# Altium PCB GD_Power_Meter.PCBDOC
Units mm, origin at the board's own origin, x right, y up, seen from the top; angles counter-clockwise.
Board outline 120.2 x 52.4 mm, 2 copper layers (Top Layer, Bottom Layer); 176 components, 72 nets, 400 pads, 293 vias.
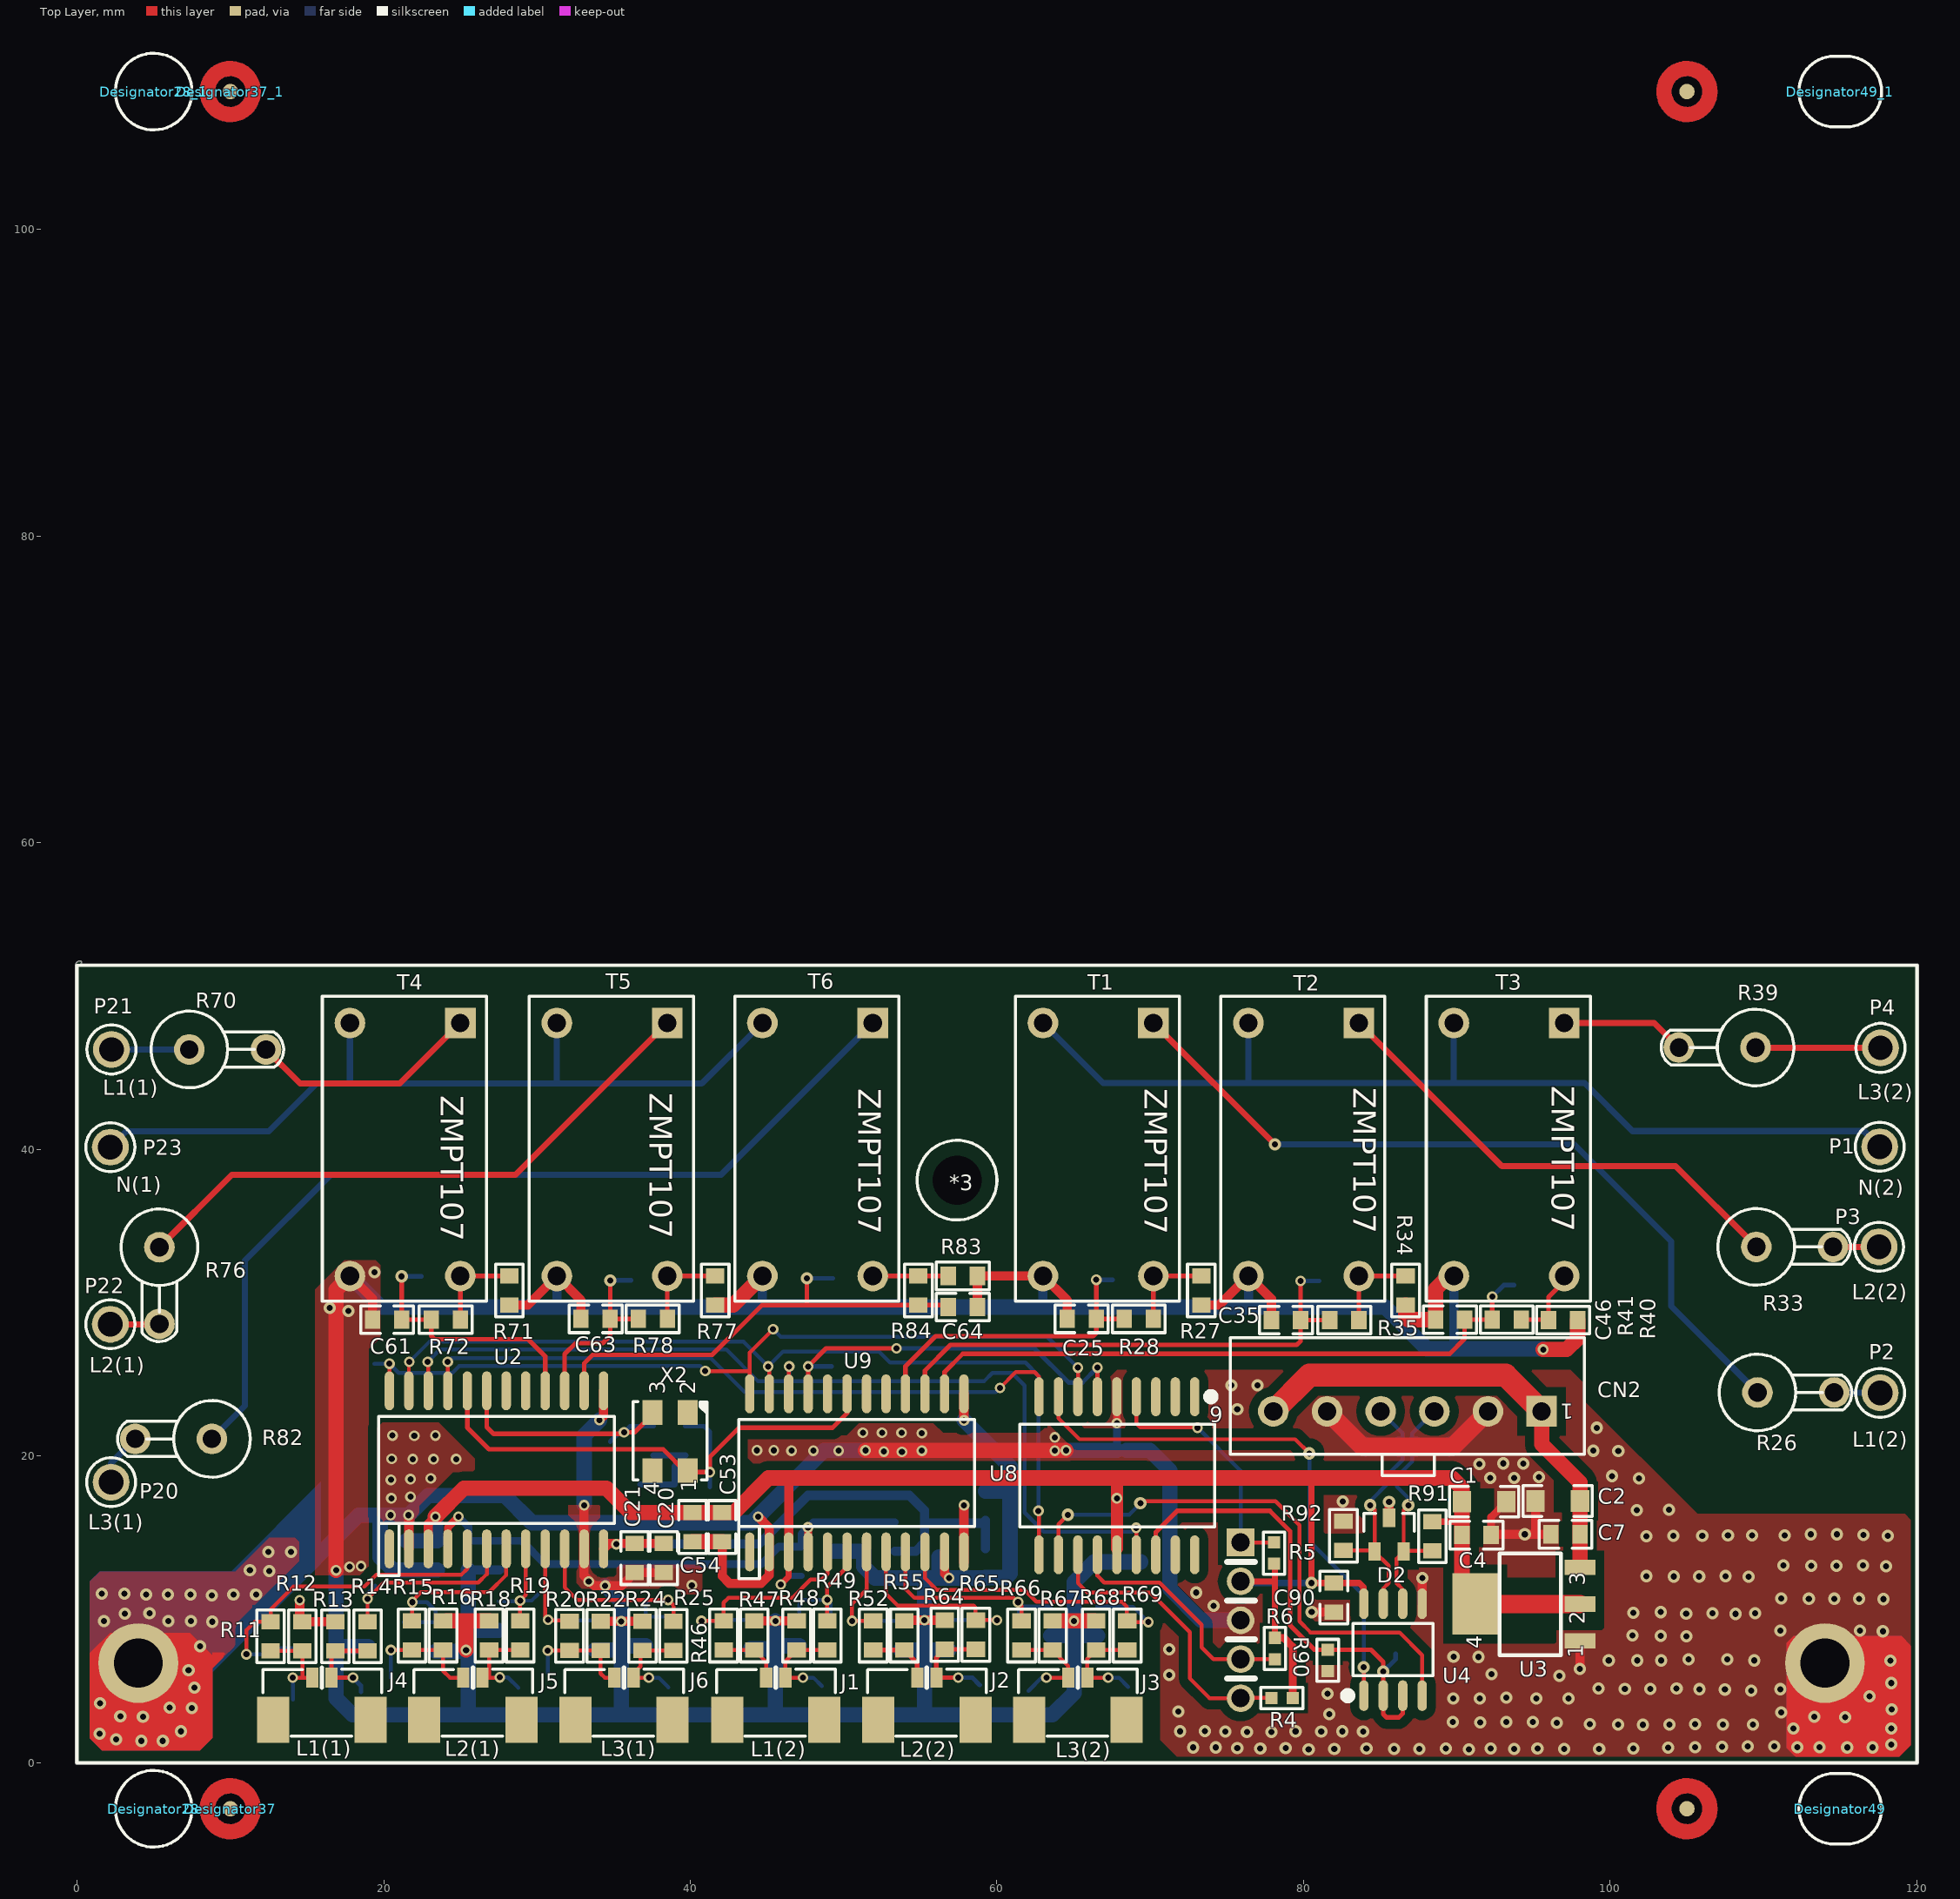
[diagram p0: Top Layer view]
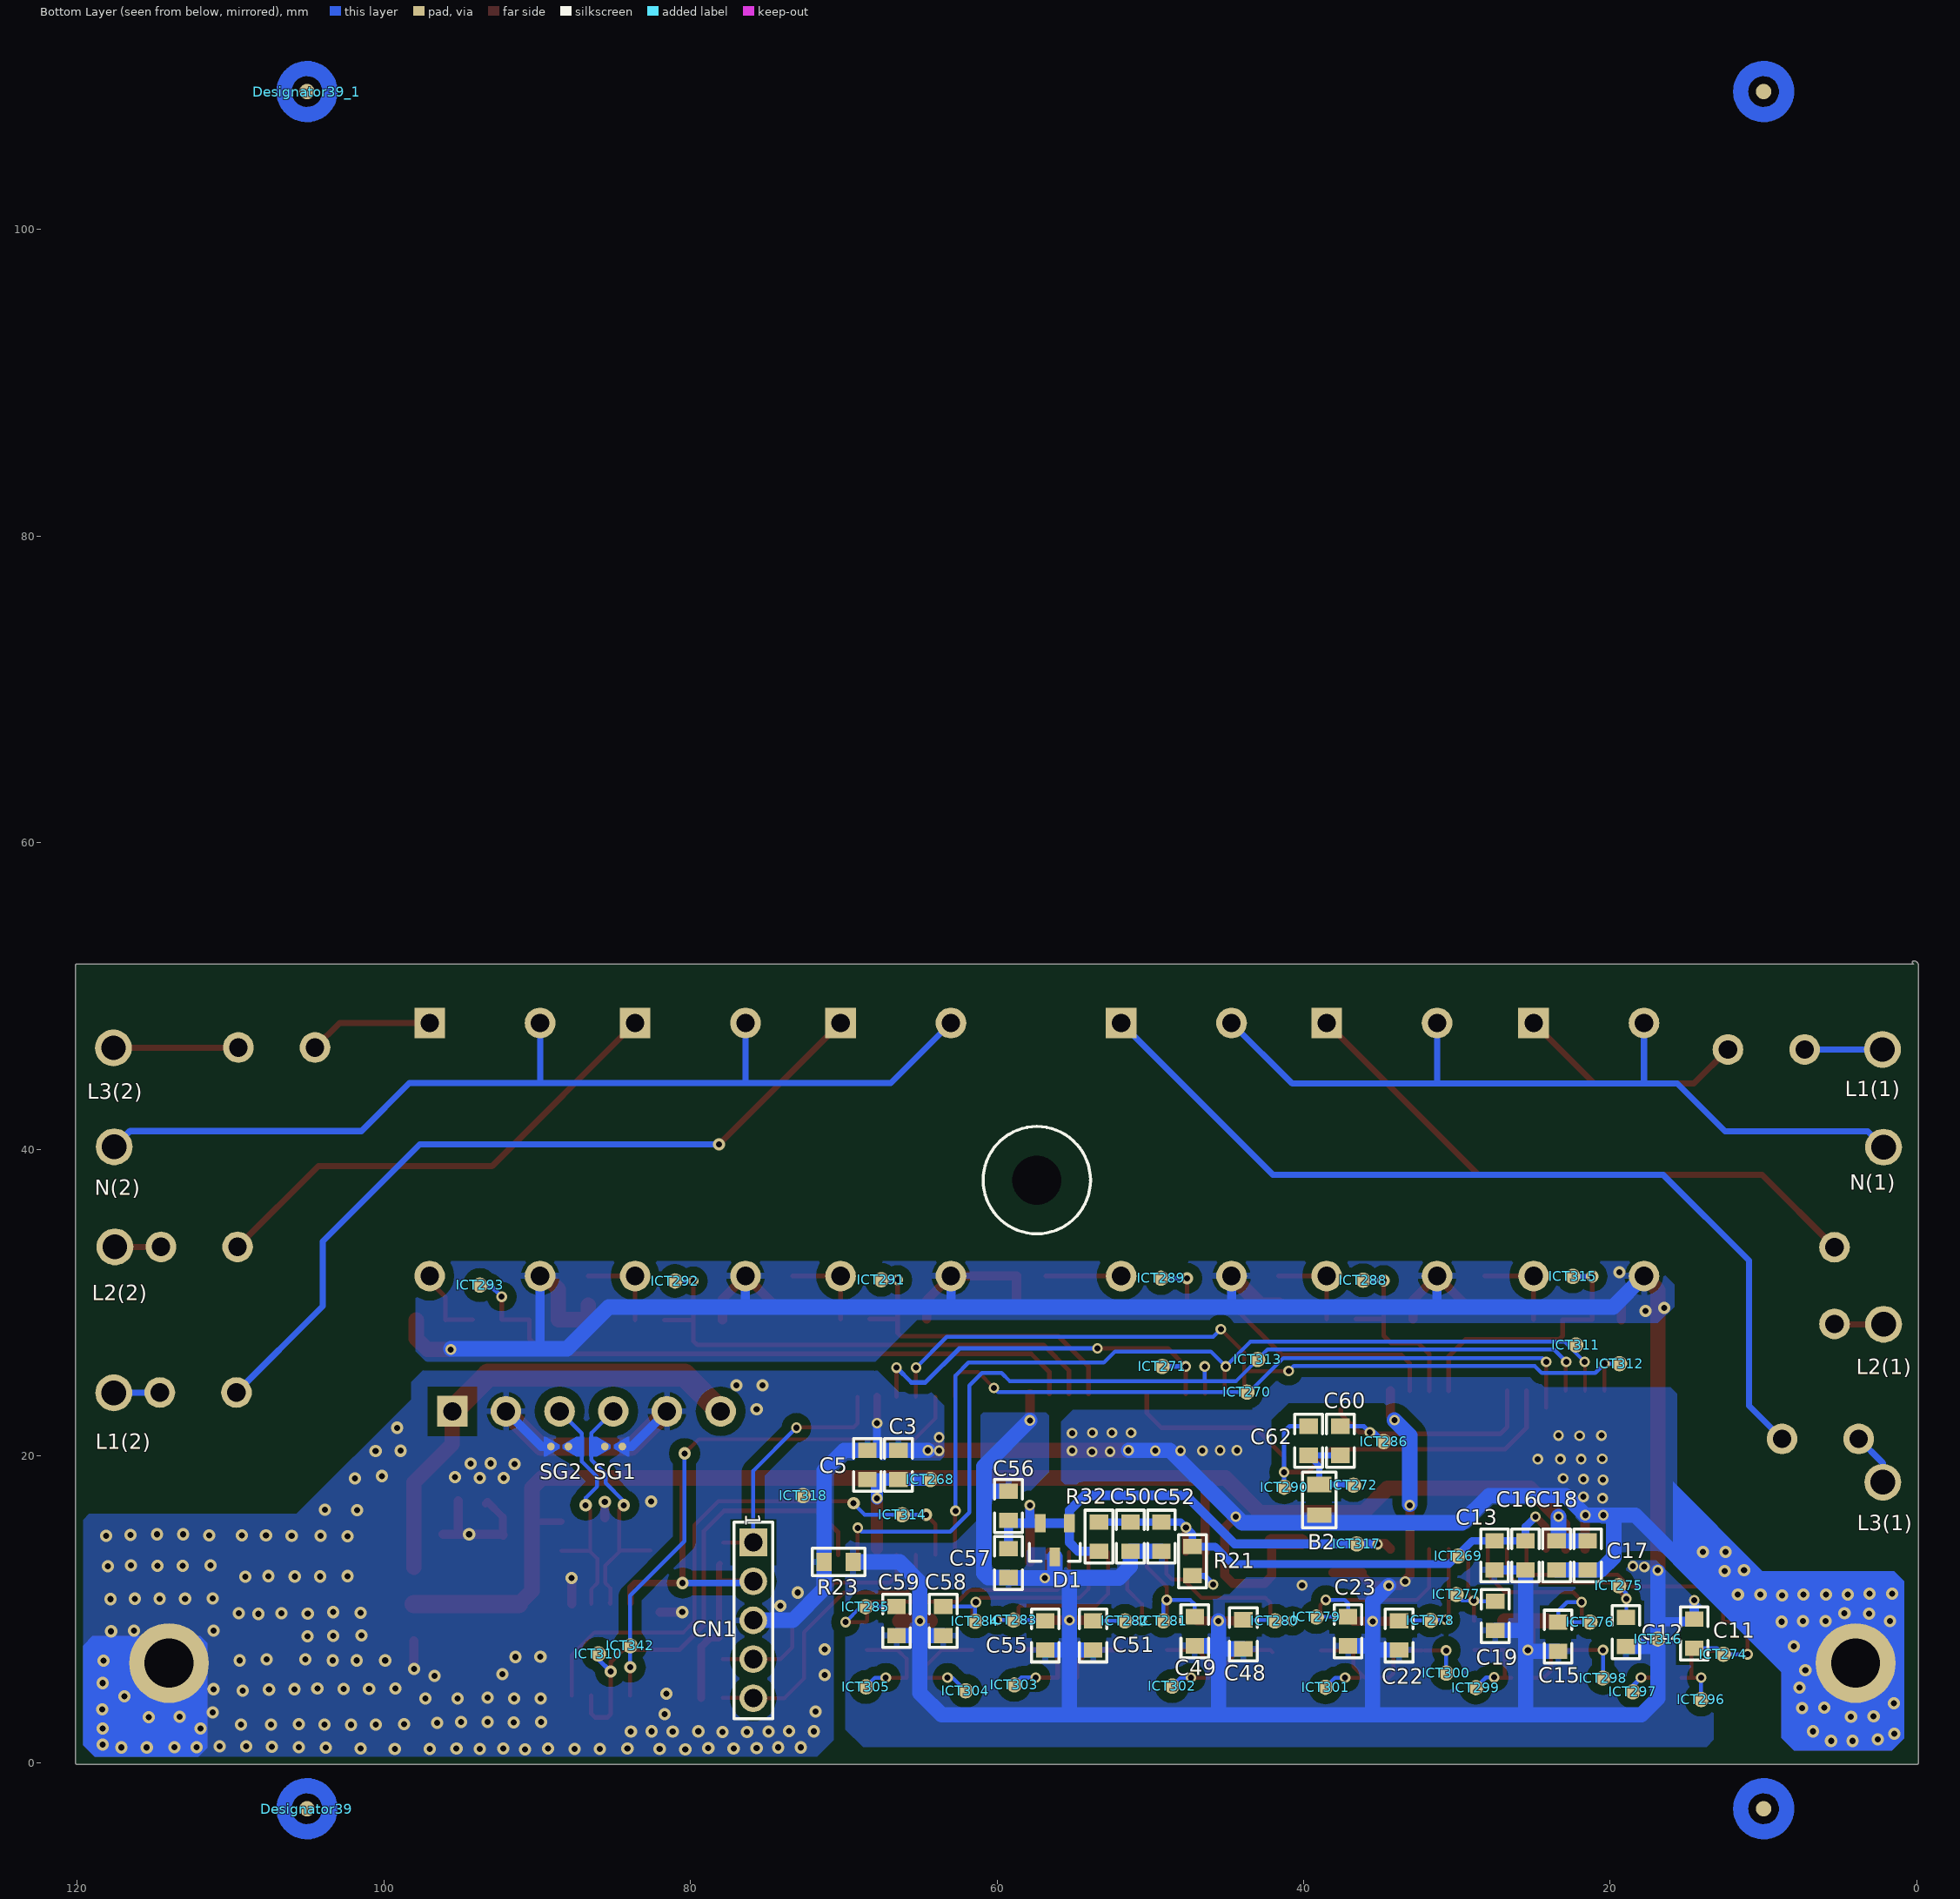
[diagram p1: Bottom Layer view, seen from below]

## Layer stack, top to bottom
Top Solder: solder mask 0.0102, Solder Resist, Dk 3.5
Top Layer: signal copper 0.0356
Dielectric1: dielectric 0.32, FR-4, Dk 4.8
Bottom Layer: signal copper 0.0356
Bottom Solder: solder mask 0.0102, Solder Resist, Dk 3.5

## Board outline
-0.101,0 -0.101,52 cw(c0.2,52) 0.2,52.301 cw(c0.2,52.2) 0.3,52.2 cw(c0.2,52.2) 0.212,52.101 120,52.101 cw(c120,52) 120.101,52 cw(c120,52) 120.1,51.988 cw(c120,51.975) 120.101,51.975 120.101,0 cw(c120,0) 120,-0.1 0,-0.1 cw(c0,0)

## Design rules (kind name [scope] priority, off if disabled: settings)
Clearance Clearance_2 [IsVia OR IsPad vs IsVia OR IsPad] p1: gap=0.4
Clearance Clearance_1 [(InPolygon)] p2: gap=0.6
Clearance [All] p3: gap=0.2
ComponentClearance [All] p1 off: gap=0.254 collisioncheckmode=3 verticalgap=0.254 showdistances=FALSE
FabricationTestPointUsage TestPointUsage [All] p1: valid=0 allowmultiple=FALSE
FabricationTestpoint Testpoint [All] p1: side=3 testpointundercomponent=TRUE minsize=1.016 maxsize=2.54 preferedsize=1.524 minholesize=0 maxholesize=1.016 preferedholesize=0.813 testpointgrid=0.025 allowsidetop=TRUE allowsidebottom=TRUE usegrid=TRUE gridtolerance=0
Height [All] p1 off: minheight=0 maxheight=25.4 prefheight=12.7
HoleSize [All] p1: absolutevalues=TRUE maxlimit=10 minlimit=0.3 maxpercent=80.000 minpercent=20.000
PlaneClearance [All] p1: clearance=0
PlaneConnect [All] p1: planeconnectstyle=Direct reliefexpansion=0.508 reliefentries=4 reliefconductorwidth=0.254 reliefairgap=0.254
PolygonConnect PolygonConnect_4 [InComponent('L1')OR InComponent('C6')OR InComponent('C27')OR InComponent('C28')] p1: connectstyle=Relief reliefconductorwidth=0.4 reliefentries=4 polygonreliefangle="90 Angle" airgapwidth=0.254
PolygonConnect PolygonConnect_3 [HasFootprint('ICTP1_0')] p2: connectstyle=Direct reliefconductorwidth=0.254 reliefentries=4 polygonreliefangle="90 Angle" airgapwidth=0.254
PolygonConnect PolygonConnect_2 [isVIA] p3: connectstyle=Direct reliefconductorwidth=0.254 reliefentries=4 polygonreliefangle="90 Angle" airgapwidth=0.254
PolygonConnect PolygonConnect_1 [OnLayer('Bottom Layer')] p4: connectstyle=Relief reliefconductorwidth=0.4 reliefentries=4 polygonreliefangle="90 Angle" airgapwidth=0.254
PolygonConnect [All] p5: connectstyle=Direct reliefconductorwidth=0.4 reliefentries=4 polygonreliefangle="90 Angle" airgapwidth=0.254
RoutingVias [All] p1: holewidth=0.6 width=1 viastyle="Through Hole" minholewidth=0.3 minwidth=0.7 maxholewidth=0.6 maxwidth=1
SilkToSolderMaskClearance SilkscreenOverComponentPads [IsPad] p1: minsilkscreentomaskgap=0.254 clearancetoexposedcopper=TRUE
SolderMaskExpansion [All] p1: expansion=0
Width [All] p1: maxlimit=10 minlimit=0.254 preferedwidth=0.3
21 further rules are at their usual default settings.

## Classes and differential pairs
component class SC10056E1: C1 C2 C3 C4 C5 C7 C90 CN1 CN2 CN5 D2 P1 P2 P3 P4 P20 P21 P22 P23 R4 R5 R6 R90 R91 R92 SG1 SG2 U3 U4 U8
component class 7758_2: C25 C35 C46 C48 C49 C50 C51 C52 C53 C54 C55 C56 C57 C58 C59 J1 J2 J3 R26 R27 R28 R33 R34 R35 R39 R40 R41 R46 R47 R48 R49 R52 R55 R64 R65 R66 R67 R68 R69 T1 T2 T3 U9
component class 7758_1: B2 C11 C12 C13 C15 C16 C17 C18 C19 C20 C21 C22 C23 C60 C61 C62 C63 C64 D1 J4 J5 J6 R11 R12 R13 R14 R15 R16 R18 R19 R20 R21 R22 R23 R24 R25 R32 R70 R71 R72 R76 R77 R78 R82 R83 R84 T4 T5 T6 U2 X2

## Components (designator, comment, footprint, x,y, rotation, side; value= is the part's Value field where it differs from the comment)
*3 "PAD" SCREW3_2 57.4,38 r0 top
B2 "FERRITE" L0805 38.975,17.15 r90 bottom
C1 "CAP" C1206 91.775,17.025 r180 top
C2 "CAP" C1206 96.575,17.075 r0 top
C3 "CAP" C0805 66.425,19.425 r90 bottom
C4 "CAP" C0805 91.275,14.85 r0 top
C5 "CAP" C0805 68.45,19.425 r90 bottom
C7 "CAP" C0805 97.075,14.9 r180 top
C11 "CAP" C0805 14.525,8.425 r270 bottom
C12 "CAP" C0805 18.975,8.525 r90 bottom
C13 "10uF" C0805 27.55,13.525 r90 bottom
C15 "CAP" C0805 23.4,8.225 r90 bottom
C16 "CAP" C0805 25.525,13.525 r90 bottom
C17 "10uF" C0805 21.475,13.525 r270 bottom
C18 "CAP" C0805 23.5,13.525 r270 bottom
C19 "CAP" C0805 27.5,9.575 r90 bottom
C20 "CAP" C0805 38.275,13.35 r90 top
C21 "CAP" C0805 36.375,13.35 r90 top
C22 "CAP" C0805 33.775,8.3 r90 bottom
C23 "CAP" C0805 37.1,8.575 r90 bottom
C25 "CAP" C0805 65.525,28.95 r0 top
C35 "CAP" C0805 78.85,28.875 r0 top
C46 "CAP" C0805 89.55,28.9 r0 top
C48 "CAP" C0805 43.925,8.375 r90 bottom
C49 "CAP" C0805 47.1,8.575 r90 bottom
C50 "10uF" C0805 51.3,14.75 r90 bottom
C51 "CAP" C0805 53.725,8.3 r90 bottom
C52 "CAP" C0805 49.275,14.75 r90 bottom
C53 "10uF" C0805 42.075,15.375 r270 top
C54 "CAP" C0805 40.15,15.375 r270 top
C55 "CAP" C0805 56.85,8.3 r90 bottom
C56 "CAP" C0805 59.25,16.75 r270 bottom
C57 "CAP" C0805 59.25,13.025 r90 bottom
C58 "CAP" C0805 63.5,9.25 r90 bottom
C59 "CAP" C0805 66.55,9.25 r90 bottom
C60 "CAP" C0805 37.6,21 r270 bottom
C61 "CAP" C0805 20.225,28.9 r0 top
C62 "CAP" C0805 39.675,21 r270 bottom
C63 "CAP" C0805 33.825,28.95 r0 top
C64 "CAP" C0805 57.775,29.725 r180 top
C90 "CAP" C0805 81.975,10.775 r270 top (schematic designator C200)
CN1 "SIP5" SIP5 75.89,14.375 r270 bottom
CN2 "Header 6" 0532580629 95.525,22.925 r180 top
D1 "Diode-3_2" SOT23-321 56.225,14.525 r0 bottom
D2 "TVS-D" SOT23-123 85.575,14.775 r0 top (schematic designator D200)
Designator28 "Comment" AI2 5,-3 r270 top
Designator28_1 "Comment" AI2 5,109 r270 top
Designator37 "Comment" MARK2 10,-3 r270 top
Designator37_1 "Comment" MARK2 10,109 r270 top
Designator39 "Comment" MARK2 105,-3 r270 bottom
Designator39_1 "Comment" MARK2 105,109 r270 bottom
Designator49 "Comment" AI1 115,-3 r0 top
Designator49_1 "Comment" AI1 115,109 r0 top
ICT268 "Comment" ICTP1_0 64.35,18.475 r0 bottom
ICT269 "Comment" ICTP1_0 29.925,13.475 r0 bottom
ICT270 "Comment" ICTP1_0 43.7,24.175 r0 bottom
ICT271 "Comment" ICTP1_0 49.225,25.85 r0 bottom
ICT272 "Comment" ICTP1_0 36.75,18.1 r0 bottom
ICT274 "Comment" ICTP1_0 12.625,7.075 r0 bottom
ICT275 "Comment" ICTP1_0 19.45,11.55 r0 bottom
ICT276 "Comment" ICTP1_0 21.325,9.175 r0 bottom
ICT277 "Comment" ICTP1_0 30.05,10.975 r0 bottom
ICT278 "Comment" ICTP1_0 31.725,9.275 r0 bottom
ICT279 "Comment" ICTP1_0 39.175,9.5 r0 bottom
ICT280 "Comment" ICTP1_0 41.875,9.25 r0 bottom
ICT281 "Comment" ICTP1_0 49.15,9.25 r0 bottom
ICT282 "Comment" ICTP1_0 51.65,9.25 r0 bottom
ICT283 "Comment" ICTP1_0 58.925,9.3 r0 bottom
ICT284 "Comment" ICTP1_0 61.425,9.225 r0 bottom
ICT285 "Comment" ICTP1_0 68.575,10.175 r0 bottom
ICT286 "Comment" ICTP1_0 34.775,20.95 r0 bottom
ICT288 "Comment" ICTP1_0 36.125,31.475 r0 bottom
ICT289 "Comment" ICTP1_0 49.3,31.6 r0 bottom
ICT290 "Comment" ICTP1_0 41.275,17.975 r0 bottom
ICT291 "Comment" ICTP1_0 67.55,31.5 r0 bottom
ICT292 "Comment" ICTP1_0 81,31.425 r0 bottom
ICT293 "Comment" ICTP1_0 93.725,31.15 r0 bottom
ICT296 "Comment" ICTP1_0 14.075,4.125 r0 bottom
ICT297 "Comment" ICTP1_0 18.525,4.625 r0 bottom
ICT298 "Comment" ICTP1_0 20.475,5.525 r0 bottom
ICT299 "Comment" ICTP1_0 28.775,4.9 r0 bottom
ICT300 "Comment" ICTP1_0 30.7,5.85 r0 bottom
ICT301 "Comment" ICTP1_0 38.575,4.925 r0 bottom
ICT302 "Comment" ICTP1_0 48.575,5 r0 bottom
ICT303 "Comment" ICTP1_0 58.875,5.075 r0 bottom
ICT304 "Comment" ICTP1_0 62.05,4.692 r0 bottom
ICT305 "Comment" ICTP1_0 68.55,4.95 r0 bottom
ICT310 "Comment" ICTP1_0 86,7.1 r0 bottom
ICT311 "Comment" ICTP1_0 22.25,27.25 r0 bottom
ICT312 "Comment" ICTP1_0 19.4,26.025 r0 bottom
ICT313 "Comment" ICTP1_0 43,26.3 r0 bottom
ICT314 "Comment" ICTP1_0 66.175,16.175 r0 bottom
ICT315 "Comment" ICTP1_0 22.45,31.725 r0 bottom
ICT316 "Comment" ICTP1_0 16.896,8.075 r0 bottom
ICT317 "Comment" ICTP1_0 36.55,14.275 r0 bottom
ICT318 "Comment" ICTP1_0 72.65,17.425 r0 bottom
ICT342 "Comment" ICTP1_0 83.925,7.625 r0 bottom
J1 "Header 2" 533980271_SD 42.4,2.8 r0 top (schematic designator J4)
J2 "Header 2" 533980271_SD 52.25,2.8 r0 top (schematic designator J5)
J3 "Header 2" 533980271_SD 62.1,2.8 r0 top (schematic designator J6)
J4 "Header 2" 533980271_SD 12.8,2.8 r0 top locked (schematic designator J1)
J5 "Header 2" 533980271_SD 22.65,2.8 r0 top (schematic designator J2)
J6 "Header 2" 533980271_SD 32.5,2.8 r0 top (schematic designator J3)
P1 "Header 1" PAD1_3 117.575,40.175 r0 top
P2 "Header 1" PAD1_3 117.6,24.125 r0 top
P3 "Header 1" PAD1_3 117.525,33.65 r0 top
P4 "Header 1" PAD1_3 117.625,46.625 r0 top
P20 "Header 1" PAD1_3 2.225,18.3 r0 top
P21 "Header 1" PAD1_3 2.25,46.525 r0 top
P22 "Header 1" PAD1_3 2.175,28.6 r0 top
P23 "Header 1" PAD1_3 2.175,40.15 r0 top
R4 "RES" R0603 78.59,4.225 r180 top
R5 "RES" R0603 78.075,13.675 r90 top
R6 "RES" R0603 78.125,7.45 r270 top
R11 "RES" R0805 12.625,8.25 r90 top
R12 "RES" R0805 14.7,8.25 r90 top
R13 "RES" R0805 16.85,8.25 r90 top
R14 "RES" R0805 18.95,8.25 r90 top
R15 "RES" R0805 21.85,8.3 r90 top
R16 "RES" R0805 23.875,8.3 r90 top
R18 "RES" R0805 26.875,8.3 r90 top
R19 "RES" R0805 28.9,8.3 r90 top
R20 "RES" R0805 32.125,8.275 r90 top
R21 "RES" R0805 47.25,13.15 r90 bottom
R22 "RES" R0805 34.15,8.275 r90 top
R23 "RES" R0805 70.325,13.1 r0 bottom
R24 "RES" R0805 36.875,8.275 r90 top
R25 "RES" R0805 38.9,8.275 r90 top
R26 "RES" MFR5W2P5 114.6,24.15 r180 top
R27 "RES" R0805 73.325,30.8 r90 top
R28 "RES" R0805 69.25,28.95 r180 top
R32 "RES" R0805 53.35,14.75 r90 bottom
R33 "RES" MFR5W2P5 114.525,33.65 r180 top
R34 "RES" R0805 86.65,30.8 r90 top
R35 "RES" R0805 82.65,28.875 r180 top
R39 "RES" MFR5W2P5 104.475,46.65 r0 top
R40 "RES" R0805 96.925,28.875 r180 top
R41 "RES" R0805 93.25,28.9 r180 top
R46 "RES" R0805 42.175,8.3 r90 top
R47 "RES" R0805 44.175,8.3 r90 top
R48 "RES" R0805 46.933,8.3 r90 top
R49 "RES" R0805 48.933,8.3 r90 top
R52 "RES" R0805 51.925,8.3 r90 top
R55 "RES" R0805 53.95,8.3 r90 top
R64 "RES" R0805 56.6,8.35 r90 top
R65 "RES" R0805 58.625,8.35 r90 top
R66 "RES" R0805 61.6,8.3 r90 top
R67 "RES" R0805 63.625,8.3 r90 top
R68 "RES" R0805 66.475,8.3 r90 top
R69 "RES" R0805 68.5,8.3 r90 top
R70 "RES" MFR5W2P5 12.325,46.525 r180 top
R71 "RES" R0805 28.2,30.8 r90 top
R72 "RES" R0805 24.05,28.9 r180 top
R76 "RES" MFR5W2P5 5.375,28.625 r90 top
R77 "RES" R0805 41.625,30.8 r90 top
R78 "RES" R0805 37.55,28.95 r180 top
R82 "RES" MFR5W2P5 3.8,21.125 r0 top
R83 "RES" R0805 57.775,31.75 r180 top
R84 "RES" R0805 54.875,30.8 r270 top
R90 "RES" R0603 81.575,6.675 r90 top (schematic designator R200)
R91 "RES" R0805 88.4,14.775 r270 top (schematic designator R201)
R92 "RES" R0805 82.6,14.8 r90 top (schematic designator R202)
SG1 "Default" PAD 85.575,20.625 r180 bottom
SG2 "Default" PAD 87.95,20.625 r0 bottom
T1 "ET00010" ZMPT107 66.6,40 r270 top
T2 "ET00010" ZMPT107 80,40 r270 top
T3 "ET00010" ZMPT107 93.4,40 r270 top
T4 "ET00010" ZMPT107 21.4,40 r270 top
T5 "ET00010" ZMPT107 34.9,40 r270 top
T6 "ET00010" ZMPT107 48.3,40 r270 top
U2 "ADE7758" SOIC24-W 20.375,13.95 r0 top
U3 "LM1117_ADJ" AS1117 98.025,7.95 r90 top
U4 "SN65HVD11D" SOIC8 83.925,4.375 r0 top (schematic designator U200)
U8 "PIC16LF1827" SO18 72.9,23.875 r180 top
U9 "ADE7758" SOIC24-W 43.875,13.75 r0 top
X2 "ABM3C" XTAL_5X3_2 38.675,20.95 r90 top

## Footprints (in the part's own frame and the unit in brackets; to place one, negate y for a bottom-side part, rotate by r counter-clockwise, add the part's x,y. Pads: shape width x height; smd on the part's side, far side on the other; paste and mask are expansions set on the pad)
0532580629 [mm]
  rect 2x2 hole 1.2: 1(0,0)
  round 2 hole 1.2: 2(3.5,0) 3(7,0) 4(10.5,0) 5(14,0) 6(17.5,0)
  silkscreen extent -2.8,-4.8 20.3,4.2, body extent -2.8,-4.9 20.3,2.8, height 10.5
533980271_SD [mm]
  rect 2.1x3 smd: 0(0,0) 0(6.35,0)
  rect 0.8x1.3 smd: 1(2.55,2.75) 2(3.8,2.75)
  silkscreen extent -0.69,-1.07 7.06,3.4, body extent -0.69,-1.07 7.06,3.3, height 4.7
AI1 [mm]
  round 0.5 hole 4 unplated: 1(0,0)
  silkscreen extent -2.7,-2.3 2.7,2.3
AI2 [mm]
  round 0.5 hole 4 unplated: 1(0,0)
  silkscreen extent -2.5,-2.5 2.5,2.5
AS1117 [mm]
  rect 1x2 smd: 1(0,0) 2(2.4,0) 3(4.8,0)
  rect 4x3 smd: 4(2.4,6.835)
  silkscreen extent -0.94,1.25 5.7,5.25, body extent -0.94,1.25 5.7,5.25, height 2.5
C0805 [mm]
  rect 1x1.2 smd: 1(-0.95,0) 2(0.95,0)
  silkscreen extent -1.73,-0.9 1.73,0.9, body extent -1.55,-0.7 1.55,0.7, height 1
C1206 [mm]
  rect 1.2x1.4 smd: 1(-1.45,0) 2(1.45,0)
  silkscreen extent -2.25,-1 2.25,1, body extent -2.3,-0.8 2.3,0.8, height 1
ICTP1_0 [mm]
  round 1 smd: 1(0,0)
L0805 [mm] "2923451010"
  rect 1x1.6 smd: 1(-1,0) 2(1,0)
  silkscreen extent -1.83,-1.1 1.8,1.1, body extent -1.6,-0.9 1.6,0.9, height 1.6
MARK2 [mm]
  round 1 smd: 1(0,0)
  round 1 smd far side: 1(0,0)
  Top Layer circle w1: c0,0 r1.5
  Bottom Layer circle w1: c0,0 r1.5
MFR5W2P5 [mm]
  round 2 hole 1.2: 1(0,0) 2(5,0)
  silkscreen extent -1.15,-2.5 7.5,2.5, body extent -1.1,-2.49 7.5,2.5, height 15.5
PAD [mil] "SPARKGAP"
  round 20 smd: 1(0,0) 2(45,0)
  Top Layer region: 23,-5 58,-25 63,-25 63,25 58,25 23,5
  Top Layer region: 15,5 -20,25 -40,25 -40,-25 -20,-25 15,-5
PAD1_3 [mm]
  round 2.4 hole 1.6: 1(0,0)
  silkscreen extent -1.6,-1.6 1.6,1.6
R0603 [mm]
  rect 0.8x0.8 smd: 1(-0.7,0) 2(0.7,0)
  silkscreen extent -1.38,-0.7 1.38,0.7
R0805 [mm]
  rect 1x1.2 smd: 1(-0.95,0) 2(0.95,0)
  silkscreen extent -1.73,-0.9 1.73,0.9, body extent -1.55,-0.7 1.55,0.7, height 1
SCREW3_2 [mm]
  round 0 hole 3.2 unplated: 1(0,0)
  silkscreen extent -2.6,-2.6 2.6,2.6
SIP5 [mm]
  rect 1.8x1.8 hole 1.2: 1(0,0)
  round 1.8 hole 1.2: 2(2.54,0) 3(5.08,0) 4(7.62,0) 5(10.16,0)
  silkscreen extent -1.32,-1.27 11.5,1.27, body extent -1.42,-1.37 11.6,1.37, height 7
SO18 [mil]
  oval 24x100 smd: 1(0,0) 2(50,0) 3(100,0) 4(150,0) 5(200,0) 6(250,0) 7(300,0) 8(350,0) 9(400,0) 10(400,406) 11(350,406) 12(300,406) 13(250,406) 14(200,406) 15(150,406) 16(100,406) 17(50,406) 18(0,406)
  silkscreen extent -51,-10 449,335, body extent -51,71 449,335, height 102
SOIC8 [mm]
  oval 0.61x2 smd: 1(0,0) 2(1.27,0) 3(2.54,0) 4(3.81,0) 5(3.81,6) 6(2.54,6) 7(1.27,6) 8(0,6)
  silkscreen extent -1.3,-0.25 4.51,4.7, body extent -0.7,1.3 4.51,4.7, height 1.75
SOIC24-W [mm]
  oval 0.61x2.54 smd: 1(0,0) 2(1.27,0) 3(2.54,0) 4(3.81,0) 5(5.08,0) 6(6.35,0) 7(7.62,0) 8(8.89,0) 9(10.16,0) 10(11.43,0) 11(12.7,0) 12(13.97,0) 13(13.97,10.312) 14(12.7,10.312) 15(11.43,10.312) 16(10.16,10.312) 17(8.89,10.312) 18(7.62,10.312) 19(6.35,10.312) 20(5.08,10.312) 21(3.81,10.312) 22(2.54,10.312) 23(1.27,10.312) 24(0,10.312)
  silkscreen extent -0.7,-1.75 14.67,8.64, body extent -0.7,1.65 14.67,8.64, height 2.5
SOT23-123 [mm]
  rect 0.8x1.2 smd: 1(-0.95,-1) 2(0.95,-1) 3(0,1.2)
  silkscreen extent -1.65,0.33 1.65,1.48, body extent -1.6,-1.3 1.6,1.3, height 1.2
SOT23-321 [mm]
  rect 0.7x1.2 smd: 1(0,1.1) 2(0.95,-1.1) 3(-0.95,-1.1)
  silkscreen extent -1.65,0.23 1.65,1.38
XTAL_5X3_2 [mm] "ABM3C"
  rect 1.6x1.3 smd: 1(-1.9,-1.15) 2(1.9,-1.15) 3(1.9,1.15) 4(-1.9,1.15)
  silkscreen extent -2.5,-2.42 2.6,2.4, body extent -2.5,-2.42 2.6,2.4, height 2
ZMPT107 [mm]
  rect 2x2 hole 1.2: 1(-8.25,3.6)
  round 2 hole 1.2: 2(-8.25,-3.6) 3(8.25,3.6) 4(8.25,-3.6)
  silkscreen extent -10,-5.4 9.9,5.3

## Part data
B2: library part EL00002, "Ferrite Bead 600OHM@100MHz 200mA SMD 0805 ROHS"
C1 C2: library part EC00088, "CAP,CMCC,10uF,25V,10%,X7R,1206,SMD,ROHS"
C3: library part EC00018, "CAP SMD CR X7R 50V 10% 10nF 0805 ROHS"
C4 C7 C16 C18 C20 C52 C54 C56 C90: library part EC00014, "CAP SMD CR X7R 50V 10% 0.1uF 0805 ROHS"
C5 C21 C57: library part EC00002, "CAP SMD CR X7R 50V 10% 1uF 0805 ROHS"
C11 C12 C15 C19 C22 C23 C25 C35 C46 C48 C49 C51 C55 C58 C59 C61 C63 C64: library part EC00079, "CAP SMD X7R 50V 10% 0.033uF 0805 ROHS"
C13 C17 C50 C53: library part EC00034, "CAP SMD CR X5R 16V 10% 10uF 0805 ROHS"
C60 C62: library part EC00017, "CAP SMD C0G 50V 5% 33pF 0805 ROHS"
CN1: library part EJ00017, "CONNECTOR 5PIN,2.54PITCH,SIP-5"
CN2: library part EJ00076, "CONNECTOR 6PIN,3.5PITCH,PTH,5.5A,250V,HEADER:0510210200 ROHS"
D1: library part EU00043, "IC PROGRAMMABLE PRECISION REFERENCES,2.5-20V,0.5%,SMD,ROHS"
D2: library part ED00007, "DIODE TVS 7V 12V 17A 400W SOT-23 SMD ROHS"
J1 J2 J3 J4 J5 J6: library part EJ00039, "CONNECTOR 1.25mm Pitch Header, Surface Mount, Vertical, Lead-Free, 2 Circuits"
P1 P2 P3 P4 P20 P21 P22 P23: "Header, 1-Pin"
R4 R5 R6 R90: library part ER00213, "RES THICK_FILM SMD 10K ohm 5% 1/10W ROHS 0603"
R11 R14 R15 R19 R20 R25 R28 R35 R41 R46 R49 R52 R65 R66 R69 R72 R78 R84: library part ER00028, "RES THICK_FILM SMD 1K 1% 1/8W ROHS 0805"
R12 R13 R16 R18 R22 R24 R47 R48 R55 R64 R67 R68: library part ER00273, "RES THIN_FILM SMD 3.32 ohm 0.5% 1/8W ±50ppm/℃ ROHS 0805"
R21 R23: library part ER00026, "RES THICK_FILM SMD 0 OHM 5% 1/8W ROHS 0805"
R26 R33 R39 R70 R76 R82: library part ER00275, "RES Film Leaded 165K 0.5% 3W ROHS ±25ppm/℃ MFR1550"
R27 R34 R40 R71 R77 R83: library part ER00280, "RES,THIN_FILM,130 ohm,0.5%	,1/10W,±25ppm/℃,ROHS,0805,SMD"
R32: library part ER00108, "RES THICK_FILM 2.49K 1% 1/8W ROHS SMD 0805"
R91 R92: library part ER00021, "RES THICK_FILM SMD 39K 5% 1/8W ROHS 0805"
SG1 SG2: library part SG?, "Spark"
T1 T2 T3 T4 T5 T6: "Voltage transformer,2mA/2mA,THT,ROHS"
U2 U9: library part EU00042, "IC Energy Measurement,Irms,VA,VAR,Vrms,Watt,Output:Pulsed&SPI,SOIC_W-24,ROHS"
U3: library part EU00005, "IC REG VOLT +5V LDO 800MA SOT223 ROHS"
U4: library part EU00041, "IC 5V,RS-485,10Mbps,16KV,TRANSCEIVERS,SOIC-8,ROHS"
U8: library part EU00033, "IC 8-bit UART SPI I2C,SOIC18-W,SMD,ROHS"
X2: library part EX00008, "XTAL 10MHz 18PF +/-30PPM,3.2mmWx5mmLx1.3mmH,-40~85,RoHS,SMD"

## Free pads (board coordinates)
  round 5.2 hole 3.2: 0(4,6.5) 0(114,6.5)

## Via types
v1: diameter 0.8, hole 0.4, Top Layer to Bottom Layer, 194 vias
v2: diameter 0.7, hole 0.4, Top Layer to Bottom Layer, 99 vias

## Nets (pads, with @x,y where several pads share a name; then routed paths per layer and width w, separated by ;. In a path a pad name is that pad's centre, name@x,y a point inside that pad or via, vN(x,y) a via of type N, cw(c..) or ccw(c..) an arc to the next point about the centre after c; other vN are vias at no path point)
5VF: C1.2 C3.1 C4.1 C5.1 C17.1 C18.1 C53.1 C54.1 C90.1 CN1.2 ICT268.1 R4.1 R5.1 R6.1 R21.1 R91.1 U2.3 U3.2 U3.4 U4.8 U8.14 U9.3 | length 138
  Top Layer w0.4: v2(45.901,11.625) 46.415,12.139 U9.3 ; CN1.2 78.125,11.835 ; R5.1 78.14,12.91 R6.1@78.14,8.15 ; 80.5,18.5 80.5,13.75 ; 80.525,13.725 80.5,13.75 ; U4.8 83.9,10.4 83.9,11.45 83.625,11.725 C90.1 v1(80.5,11.725) 80.5,13.75 ; R91.1 90.3,15.725 90.325,15.7
  Top Layer w0.5: R6.1@78.14,8.15 78.7,8.15 79.29,7.56 R4.1
  Top Layer w0.6: U2.3 22.915,15.59 v2(23.375,16.05) ; 46.4,18.575 46.415,18.56 U9.3
  Top Layer w0.8: U8.14@67.82,13.988 67.82,18.4
  Top Layer w1: v2(23.375,16.05) 25.225,17.9 34.525,17.9 36.1,16.325 42.85,16.325 45.1,18.575 46.4,18.575 89.675,18.575 90.325,17.925 C1.2 90.325,15.7 C4.1 90.325,11.215 U3.4
  Top Layer w1.2: U3.4 U3.2
  Bottom Layer w0.4: v2(45.901,11.625) 46.476,12.2 R21.1 ; CN1.2 76,11.725 v1(80.5,11.725)
  Bottom Layer w0.8: ICT268.1 C3.1 67.8,18.475 67.825,18.45 v2(67.825,17.25)
  Bottom Layer w1: C17.1 C18.1 23.375,14.6 v2(23.375,16.05)
12V: C2.2 C7.1 CN2.1 CN2.6 U3.3 | length 30.7
  Top Layer w1: CN2.1 95.525,20.775 98.025,18.275 C2.2 C7.1 U3.3
  Top Layer w1.5: CN2.6 80.375,25.275 93.175,25.275 CN2.1
AGND: C11.1 C12.1 C13.1 C15.1 C16.1 C19.1 C20.1 C21.1 C22.1 C23.1 C25.1 C35.1 C46.1 C48.1 C49.1 C50.1 C51.1 C52.1 C55.1 C56.1 C57.1 C58.1 C59.1 C61.1 C63.1 C64.1 D1.1 ICT316.1 R12.2 R13.2 R16.2 R18.2 R22.2 R23.1 R24.2 R27.1 R34.1 R40.1 R47.2 R48.2 R55.2 R64.2 R67.2 R68.2 R71.1 R77.1 R83.1 T1.4 T2.4 T3.4 T4.4 T5.4 T6.4 U2.11 U2.13 U9.11 U9.13 | length 349.3
  Top Layer w0.6: v2(14.525,10.6) 14.525,9.375 R12.2 R13.2 ; T4.4 19.275,30.275 C61.1 ; R71.1 29.4,29.85 T5.4 32.875,30.175 C63.1 ; v2(33.075,16.8) U2.11 33.075,12.2 33.725,11.55 v2(34.45,11.55) 35.525,11.55 C21.1 ; v2(34.075,22.35) 34.345,22.62 U2.13 ; R22.2@34.25,9.275 34.3,9.225 R24.2@36.75,9.225 ; C21.1@36.175,12.4 C20.1@38.075,12.4 ; R47.2 R48.2 ; R55.2@54.2,9.3 R64.2 ; U9.11 56.575,12.35 v2(56.875,12.05) ; U9.13 57.845,22.33 v2(57.85,22.325) ; C64.1 R83.1 T1.4 64.575,30.175 C25.1 ; R27.1 74.5,29.85 T2.4 77.9,30.25 C35.1 ; T3.4@89.55,31.5 T3.4@89.55,31.85
  Top Layer w1: v2(16.9,12.55) 16.9,30.85 T4.4 ; R16.2@24.125,9.25 25.375,9.25 ; v2(25.375,7.35) 25.375,9.25 ; R18.2 25.375,9.25 ; R77.1 42.8,29.85 T6.4 ; 64.35,9.25 R68.2@66.35,9.25 ; R34.1 86.65,29.075 86.825,28.9 C46.1 88.6,30.9 T3.4@89.55,31.85 ; v2(95.625,26.95) 97.15,26.95 97.875,27.675 R40.1
  Bottom Layer w0.6: v2(14.525,10.6) 14.525,9.2 16.896,9.2 ; C16.1 C13.1 ; T5.4 31.3,29.825 31.4,29.725 ; 44.625,29.725 44.7,29.8 T6.4 ; 45.55,3.175 45.6,3.125 ; T1.4 63,29.75 63.025,29.725 ; T2.4 76.4,29.8 76.475,29.725 ; 89.8,27 T3.4
  Bottom Layer w1: v2@16.896,12.446 16.896,9.2 ICT316.1@16.896,7.625 ; T4.4 19.825,29.725 31.4,29.725 44.625,29.725 63.025,29.725 76.475,29.725 85.325,29.725 88.05,27 89.8,27 v2@95.625,27 ; C12.1 16.946,7.575 ICT316.1@16.896,7.625 ; C15.1 25.3,7.275 v2(25.375,7.35) ; C16.1 25.525,8.55 ; C19.1 25.6,8.625 25.525,8.55 ; v2@33.075,16.85 33.075,21.35 v2(34.075,22.35) ; C22.1 35.475,7.35 35.5,7.375 ; v2(34.45,11.55) 35.5,10.5 v2(35.5,9.225) 35.5,7.375 ; C23.1 35.75,7.625 35.5,7.375 ; C48.1 45.525,7.425 45.55,7.45 ; 45.55,3.175 45.55,7.45 ; v2(45.55,9.25) 45.55,7.45 ; C49.1 45.725,7.625 45.55,7.45 ; C52.1 C50.1 51.3,12.8 52.05,12.05 55.275,12.05 ; C51.1 55.25,7.35 55.275,7.375 ; D1.1 56.225,12.05 ; C55.1 55.3,7.35 55.275,7.375 ; v2(57.85,22.325) 60.85,19.325 60.85,17.65 ; C56.1 60.8,17.7 60.85,17.65 ; C58.1 64.975,8.3 65.025,8.35 ; C59.1 65.075,8.3 65.025,8.35 ; R23.1 66.35,13.1 65.025,11.775 v2(65.025,9.25) 65.025,8.35 ; ICT316.1@16.896,7.625 16.896,4.204 17.975,3.125 25.5,3.125 ; 25.5,3.125 25.525,3.15 25.525,8.55 ; 25.5,3.125 35.375,3.125 ; 35.375,3.125 35.5,3.25 35.5,7.375 ; 35.375,3.125 45.6,3.125 55.35,3.125 ; 55.275,7.375 v2(55.275,9.3) 55.275,12.05 ; 55.275,7.375 55.275,3.2 55.35,3.125 ; 55.275,12.05 56.225,12.05 ; 55.35,3.125 63.6,3.125 65.025,4.55 65.025,8.35 ; 56.225,12.05 v2(56.875,12.05) 59.225,12.05 C57.1 60.575,12.075 60.85,12.35 60.85,17.65
  other v1: 17.7,29.475 16.475,29.675 19.4,32
  other v2: 40.1,11.575 33.375,11.825 17.775,12.775 18.525,12.825
AVDD: C13.2 C16.2 C50.2 C52.2 ICT269.1 R21.2 R32.2 U2.4 U9.4 | length 35.9
  Top Layer w0.5: U2.4 24.185,15.36 v2(24.875,16.05) ; U9.4@47.675,13.76 U9.4 47.685,15.34 v2(47.675,15.35)
  Bottom Layer w0.5: v2(24.875,16.05) 25.525,15.4 C16.2 C13.2 29,14.475 30.525,12.95 44.625,12.95 45.775,14.1 R21.2 47.25,14.925 v2(47.675,15.35) 48.025,15.7 C52.2 C50.2 R32.2
CS1: ICT270.1 U2.21 U8.9 | length 44.7
  Top Layer w0.254: v2(24.175,26.15) 24.175,24.272 U2.21 U2.21@24.185,23.16 ; v2(60.2,24.45) 61.225,25.475 62.45,25.475 62.74,25.185 U8.9
  Bottom Layer w0.254: v2@24.009,26.25 24.175,26.25 v2(24.175,26.15) 24.425,26.4 41.325,26.4 ICT270.1@43.55,24.175 ; ICT270.1 59.925,24.175 v2(60.2,24.45)
CS2: ICT271.1 U8.6 U9.21 | length 26.1
  Top Layer w0.3: U9.21 v2(47.685,25.85) 48.86,27.025 v2(53.45,27.025) ; U8.6 v2(66.55,25.775)
  Bottom Layer w0.3: v2@47.675,26.05 47.685,26.04 v2(47.685,25.85) ICT271.1 ; v2(53.45,27.025) 62.45,27.025 64.675,24.8 65.575,24.8 v2(66.55,25.775)
L21: P21.1 R70.2 | length 5.1
  Bottom Layer w0.4: P21.1 R70.2
L22: P22.1 R76.1 | length 3.2
  Top Layer w0.4: P22.1 5.35,28.6 R76.1
L23: P20.1 R82.1 | length 3.5
  Bottom Layer w0.4: P20.1 2.225,19.55 R82.1
N1: P1.1 T1.2 T2.2 T3.2 | length 65.8
  Bottom Layer w0.4: T1.2 66.925,44.325 76.4,44.325 ; T2.2 76.4,44.325 ; T3.2 89.8,44.4 89.875,44.325 ; P1.1 116.55,41.2 101.45,41.2 98.325,44.325 89.875,44.325 ; 76.4,44.325 89.875,44.325
N2: P23.1 T4.2 T5.2 T6.2 | length 53.8
  Bottom Layer w0.4: P23.1 3.2,41.175 12.5,41.175 15.625,44.3 17.8,44.3 ; T4.2 17.8,44.3 ; 31.3,44.325 T5.2 ; T6.2 40.75,44.3 17.8,44.3
NetB2_2: B2.2 C60.2 C62.2 ICT272.1 | length 6.5
  Bottom Layer w0.4: ICT272.1@36.75,18.15 B2.2 38.975,19.35 C62.2 C60.2
NetC11_2: C11.2 ICT274.1 R11.2 U2.5 | length 23
  Top Layer w0.254: v2(11.05,7.075) 11.05,8.65 11.6,9.2 R11.2 12.625,10 14.125,11.5 18.75,11.5 19.524,12.274 25.075,12.274 25.455,12.654 U2.5
  Bottom Layer w0.254: v2(11.05,7.075) ICT274.1 13.025,7.475 C11.2
NetC12_2: C12.2 ICT275.1 R14.2 U2.6 | length 13.9
  Top Layer w0.254: R14.2 v2(18.95,10.7) 20,11.75 26.175,11.75 26.725,12.3 U2.6
  Bottom Layer w0.254: C12.2 18.95,9.5 v2(18.95,10.7) 18.975,10.725 18.975,11.075 ICT275.1
NetC15_2: C15.2 ICT276.1 R15.2 U2.7 | length 14.4
  Top Layer w0.254: R15.2 21.85,10.55 22.425,11.125 26.873,11.125 27.995,12.247 U2.7
  Bottom Layer w0.254: ICT276.1 C15.2 23.4,9.9 22.825,10.475 v2(21.875,10.475)
NetC19_2: C19.2 ICT277.1 R19.2 U2.8 | length 7.6
  Top Layer w0.254: R19.2 28.875,9.25 28.9,9.275 v2(28.9,10.575) 29.265,10.94 U2.8
  Bottom Layer w0.254: C19.2 28.85,10.525 v2(28.9,10.575) 29.65,10.575 ICT277.1
NetC22_2: C22.2 ICT278.1 R20.2 U2.9 | length 9.5
  Top Layer w0.254: U2.9 30.535,9.465 30.725,9.275 R20.2@32.25,9.275
  Bottom Layer w0.254: v2@30.825,9.225 v2(30.725,9.325) 31.675,9.325 ICT278.1 33.75,9.275 C22.2
NetC23_2: C23.2 ICT279.1 R25.2 U2.10 | length 15.6
  Top Layer w0.254: U2.10 31.805,11.445 32.625,10.625 v2(38.55,10.625) 38.9,10.275 R25.2
  Bottom Layer w0.254: v2(38.55,10.625) 37.325,10.625 37.1,10.4 C23.2 39.15,9.525 ICT279.1
NetC48_2: C48.2 ICT280.1 R46.2 U9.5 | length 14.9
  Top Layer w0.254: v2(40.725,9.25) R46.2 42.175,10.45 42.475,10.75 46.65,10.75 47.85,11.95 48.588,11.95 48.955,12.317 U9.5
  Bottom Layer w0.254: v2(40.725,9.25) ICT280.1 41.95,9.325 C48.2
NetC49_2: C49.2 ICT281.1 R49.2 U9.6 | length 9.3
  Top Layer w0.254: R49.2@48.925,9.25 R49.2 48.933,10.617 v2(48.925,10.625) 48.925,11.474 50.225,12.774 U9.6
  Bottom Layer w0.254: C49.2 47.1,10.325 47.4,10.625 v2(48.925,10.625) 49.15,10.4 ICT281.1
NetC51_2: C51.2 ICT282.1 R52.2 U9.7 | length 9.5
  Top Layer w0.254: U9.7 51.495,11.295 50.55,10.35 v2(50.55,9.25) R52.2 R52.2@51.95,9.25
  Bottom Layer w0.254: v2(50.55,9.25) ICT282.1 C51.2
NetC55_2: C55.2 ICT283.1 R65.2 U9.8 | length 14.3
  Top Layer w0.254: U9.8 52.765,11.01 53.533,10.242 58.483,10.242 58.6,10.125 58.6,9.3 v2(60,9.3)
  Bottom Layer w0.254: C55.2 56.9,9.3 ICT283.1 v2(60,9.3)
NetC58_2: C58.2 ICT284.1 R66.2 U9.9 | length 14.2
  Top Layer w0.254: U9.9 54.035,11.34 54.625,10.75 61.1,10.75 ; R66.2 v2@61.6,10.25
  Bottom Layer w0.254: v2(61.375,10.475) v2@61.425,10.425 ; ICT284.1 v2@61.425,10.425 ; C58.2 61.65,10.2 v2@61.425,10.425
NetC59_2: C59.2 ICT285.1 R69.2 U9.10 | length 21.8
  Top Layer w0.254: U9.10 55.305,12.045 56.075,11.275 61.8,11.275 62.575,10.5 68.15,10.5 68.475,10.175 68.475,9.25 68.55,9.175 v2(69.875,9.175)
  Bottom Layer w0.254: C59.2 68.55,10.2 ICT285.1 68.875,10.175 v2(69.875,9.175)
NetC60_1: C60.1 ICT286.1 U2.19 X2.3 | length 17.4
  Top Layer w0.3: U2.19 26.725,21.9 27.175,21.45 v2@35.675,21.45 ; v2(35.675,21.55) 36.375,21.55 37.575,22.75 X2.3@37.575,23.05
  Bottom Layer w0.3: ICT286.1 35.375,21.55 v2(35.675,21.55) 36.075,21.95 C60.1
NetC62_1: C62.1 ICT290.1 U2.20 U9.19 X2.1 | length 37.2
  Top Layer w0.3: U2.20 25.455,21.87 26.875,20.45 38.225,20.45 39.725,18.95 v2(41.275,18.95) 41.275,19.95 43.175,21.85 49.275,21.85 50.225,22.8 U9.19
  Bottom Layer w0.3: C62.1 40.9,21.95 41.275,21.575 v2(41.275,18.95) ICT290.1
NetCN1_1: CN1.1 R5.2 U8.4 | length 16.5
  Top Layer w0.254: U8.4 69.09,22.135 69.354,21.871 73.058,21.871 v2(73.079,21.851) ; CN1.1 R5.2@77.865,14.375
  Bottom Layer w0.254: v2(73.079,21.851) 73.058,21.871 75.9,19.03 CN1.1@75.9,14.375
NetCN1_4: CN1.4 R6.2 U8.13 | length 15.8
  Top Layer w0.254: U8.13 66.55,12.2 67,11.75 70.6,11.75 73.35,9 73.35,7.525 74.12,6.755 CN1.4 75.895,6.75 R6.2@77.89,6.75
NetCN1_5: CN1.5 R4.2 U8.12 | length 19.3
  Top Layer w0.254: U8.12 65.28,11.725 65.905,11.1 70,11.1 72.575,8.525 72.575,5.5 73.86,4.215 CN1.5 75.9,4.225 R4.2
NetJ1_1: J1.1 R46.1 R47.1 | length 4.4
  Top Layer w0.254: R46.1@42.025,7.2 R46.1 43.275,7.35 ; 43.225,7.3 43.275,7.35 ; J1.1 44.95,6.575 R47.1 43.275,7.35
NetJ1_2: ICT302.1 J1.2 R48.1 R49.1 | length 6.7
  Top Layer w0.254: v2(47.35,5.55) J1.2 46.2,6.625 46.925,7.35 R48.1 R49.1
  Bottom Layer w0.254: v2(47.35,5.55) 48.025,5.55 ICT302.1
NetJ2_1: J2.1 R52.1 R55.1 | length 4.2
  Top Layer w0.3: R52.1 R55.1 54.8,6.5 J2.1
NetJ2_2: ICT303.1 J2.2 R64.1 R65.1 | length 7.1
  Top Layer w0.3: v2(57.475,5.55) J2.2 56.05,6.85 R64.1 R65.1@58.6,7.4
  Bottom Layer w0.3: v2(57.475,5.55) 58.4,5.55 ICT303.1
NetJ3_1: ICT304.1 J3.1 R66.1 R67.1 | length 7.2
  Top Layer w0.254: R66.1 63.6,7.35 64.65,6.3 J3.1 v2(63.225,5.55)
  Bottom Layer w0.254: ICT304.1 62.908,5.55 v2(63.225,5.55)
NetJ3_2: ICT305.1 J3.2 R68.1 R69.1 | length 7
  Top Layer w0.254: v2(67.25,5.55) J3.2 65.9,6.775 R68.1 R69.1
  Bottom Layer w0.254: v2(67.25,5.55) 67.95,5.55 ICT305.1
NetJ4_1: ICT296.1 J4.1 R11.1 R12.1 | length 6.5
  Top Layer w0.254: R11.1 R12.1 14.7,5.575 14.725,5.55 ; v2(14.075,5.55) 14.725,5.55 ; J4.1 14.725,5.55
  Bottom Layer w0.254: ICT296.1 v2(14.075,5.55)
NetJ4_2: ICT297.1 J4.2 R13.1 R14.1 | length 6.5
  Top Layer w0.3: v2(18,5.55) J4.2 16.6,7.05 R13.1 R14.1
  Bottom Layer w0.3: v2(18,5.55) 18.525,5.025 ICT297.1
NetJ5_1: ICT298.1 J5.1 R15.1 R16.1 | length 8.1
  Top Layer w0.254: v2(20.475,7.35) R15.1 ; R15.1@21.875,7.35 R16.1 23.875,6 24.325,5.55 J5.1
  Bottom Layer w0.254: ICT298.1 v2(20.475,7.35)
NetJ5_2: ICT299.1 J5.2 R18.1 R19.1 | length 6.5
  Top Layer w0.254: J5.2 J5.2@26.725,5.55 ; v2(27.575,5.575) 27.55,5.55 J5.2@26.725,5.55 ; R19.1@28.875,7.35 R18.1 26.875,5.7 J5.2@26.725,5.55
  Bottom Layer w0.254: v2(27.575,5.575) 28.1,5.575 ICT299.1
NetJ6_1: ICT300.1 J6.1 R20.1 R22.1 | length 7.5
  Top Layer w0.254: v2(30.7,7.325) R20.1 ; R20.1@32.3,7.325 R22.1 34.15,5.825 34.425,5.55 J6.1 ; R22.1@34.25,7.375 R22.1@34.45,7.375
  Bottom Layer w0.254: ICT300.1 v2(30.7,7.325)
NetJ6_2: ICT301.1 J6.2 R24.1 R25.1 | length 6.6
  Top Layer w0.254: J6.2@36.05,5.575 36.75,6.275 R24.1@36.75,7.325 ; J6.2 v2(37.3,5.55) ; R24.1 R25.1@38.875,7.325
  Bottom Layer w0.254: v2(37.3,5.55) 37.95,5.55 ICT301.1
NetP2_1: P2.1 R26.1 | length 3
  Top Layer w0.4: R26.1 R26.1@114.625,24.125
  Bottom Layer w0.4: R26.1 114.625,24.125 P2.1
NetP3_1: P3.1 R33.1 | length 3
  Top Layer w0.4: R33.1 P3.1
NetP4_1: P4.1 R39.2 | length 8.2
  Top Layer w0.4: R39.2 109.5,46.625 P4.1
NetR26_2: R26.2 T1.1 | length 51.9
  Top Layer w0.4: T1.1 v1(78.125,40.325)
  Bottom Layer w0.4: v1(78.125,40.325) 97.65,40.325 103.975,34 103.975,29.775 R26.2
NetR27_2: R27.2 R28.1 T1.3 | length 5.9
  Top Layer w0.3: R28.1 T1.3 R27.2
NetR33_2: R33.2 T2.1 | length 32.3
  Top Layer w0.4: T2.1 92.925,38.925 104.25,38.925 R33.2
  Bottom Layer w0.4: T2.1 T2.1@83.9,48.25
NetR34_2: R34.2 R35.1 T2.3 | length 5.9
  Top Layer w0.3: R35.1 T2.3 R34.2
NetR39_1: R39.1 T3.1 | length 8.1
  Top Layer w0.4: T3.1 102.875,48.25 R39.1
NetR40_2: R40.2 R41.1 T3.3 | length 5.2
  Top Layer w0.3: R41.1 95.95,28.9 R40.2 95.975,30.375 97.175,31.575 T3.3
NetR70_1: R70.1 T4.1 | length 15.2
  Top Layer w0.4: R70.1 14.55,44.3 21.05,44.3 T4.1
NetR71_2: R71.2 R72.1 T4.3 | length 6
  Top Layer w0.3: R72.1 T4.3 R71.2
NetR76_2: R76.2 T5.1 | length 39.2
  Top Layer w0.4: R76.2 10.1,38.35 28.6,38.35 T5.1
NetR77_2: R77.2 R78.1 T5.3 | length 5.9
  Top Layer w0.3: R78.1 T5.3 R77.2
NetR82_2: R82.2 T6.1 | length 59.9
  Bottom Layer w0.4: R82.2 10.95,23.275 10.95,32.75 16.55,38.35 42,38.35 T6.1
NetR83_2: R83.2 R84.1 T6.3 | length 4.9
  Top Layer w0.3: T6.3 R84.1 R83.2
RS485+: CN2.3 D2.2 R91.2 SG2.1 U4.6 | length 16.3
  Top Layer w0.254: U4.6 86.465,11.31 86.05,11.725 86.05,13.3 D2.2 ; v1(86.825,16.8) 86.525,16.5 D2.2 ; R91.2 86.575,13.825 D2.2
  Bottom Layer w0.254: v1(86.825,16.8) 86.825,17.275 86.075,18.025 86.075,18.65 87.075,19.65 87.075,21.475 CN2.3
RS485-: CN2.4 D2.1 R92.1 SG1.1 U4.7 | length 16.8
  Top Layer w0.254: R92.1 84.55,13.85 D2.1 ; v1(84.35,16.8) 84.625,16.525 D2.1 ; U4.7@85.25,10.43 U4.7 85.195,11.37 85.55,11.725 85.55,12.85 D2.1
  Bottom Layer w0.254: v1(84.35,16.8) 84.35,17.075 85.525,18.25 85.525,18.825 86.45,19.75 86.45,21.5 CN2.4
RS485EN: ICT310.1 R90.2 U4.2 U4.3 U8.16 | length 32.1
  Top Layer w0.3: U8.16 70.36,15.035 71.75,16.425 77.8,16.425 79.125,15.1 79.125,8.95 80.7,7.375 84.4,7.375 85.195,6.58 U4.2 85.195,3.18 85.425,2.95 86.2,2.95 86.465,3.215 U4.3
  Bottom Layer w0.3: v1(85.2,5.95) 86,6.75 ICT310.1
RX: ICT342.1 U4.1 U8.8 | length 36
  Top Layer w0.254: U8.8 64.01,22.465 65.375,21.1 79.45,21.1 v1(80.375,20.175) ; U4.1 v1(83.925,6.225)
  Bottom Layer w0.254: v1(80.375,20.175) 80.375,14.45 83.925,10.9 ICT342.1 v1(83.925,6.225)
SCK1: ICT311.1 U2.23 U8.10 U9.23 | length 58.3
  Top Layer w0.254: U2.23 21.645,26.12 v2(21.675,26.15) ; v2(45.075,25.85) 45.145,25.78 U9.23 ; v2(62.7,16.425) 62.74,16.385 U8.10@62.74,13.988
  Bottom Layer w0.254: v2(21.675,26.15) 22.983,27.458 43.467,27.458 v2(45.075,25.85) 46.05,26.825 52.3,26.825 53.025,26.1 61.85,26.1 62.7,25.25 v2(62.7,16.425)
SDI1: ICT312.1 U2.24 U8.7 U9.24 | length 54.5
  Top Layer w0.254: U2.24 v2(20.375,26.025) ; v2(40.975,25.55) 43.875,25.55 ; U9.24 43.875,25.55 ; v2(45.4,28.275) 43.875,26.75 43.875,25.55 ; v2(65.275,25.775) 65.28,25.77 U8.7
  Bottom Layer w0.254: ICT312.1 v2(20.375,26.025) 20.981,25.419 24.478,25.419 24.934,25.875 40.65,25.875 v2(40.975,25.55) ; v2(45.4,28.275) 45.9,27.775 63.275,27.775 v2(65.275,25.775)
SDO1: ICT313.1 U2.22 U8.15 U9.22 | length 63.2
  Top Layer w0.254: U2.22 v2@22.915,26.19 ; U9.22 v2@46.415,25.85 ; v2(69.075,15.325) 69.09,15.31 U8.15
  Bottom Layer w0.254: v2@22.915,26.19 23.675,26.95 42.35,26.95 44.4,24.9 46.425,24.9 ; v2(46.45,25.85) 46.45,24.925 46.425,24.9 ; v2(69.075,15.325) 68.825,15.075 63.05,15.075 61.8,16.325 61.8,24.6 60.975,25.425 59.7,25.425 59.175,24.9 46.425,24.9
  other v2: 22.875,26.15
TX: ICT314.1 U4.4 U8.11 | length 36.8
  Top Layer w0.254: U8.11 64.01,15.56 v1(64.625,16.175) ; v1(69.35,16.925) 69.475,17.05 78.175,17.05 79.725,15.5 79.725,9.225 80.45,8.5 86.25,8.5 87.735,7.015 U4.4
  Bottom Layer w0.254: v1(64.625,16.175) ICT314.1 68.625,16.175 69.35,16.9 v1(69.35,16.925)
VAP1: C25.2 ICT291.1 R28.2 U9.16 | length 21.5
  Top Layer w0.3: U9.16 54.035,25.86 56,27.825 66.275,27.825 66.475,28.025 C25.2 ; v2(66.475,31.5) C25.2 ; R28.2 C25.2
  Bottom Layer w0.3: v2(66.475,31.5) ICT291.1
VAP2: C61.2 ICT315.1 R72.2 U2.16 | length 17.3
  Top Layer w0.3: v1(21.175,31.725) C61.2 R72.2 23.1,27.85 23.325,27.625 29.425,27.625 30.535,26.515 U2.16
  Bottom Layer w0.3: v1(21.175,31.725) ICT315.1
VBP1: C35.2 ICT292.1 R35.2 U9.15 | length 33.8
  Top Layer w0.3: U9.15 55.305,25.58 56.975,27.25 79.55,27.25 79.8,27.5 C35.2 ; v2(79.8,31.425) C35.2 ; R35.2 C35.2
  Bottom Layer w0.3: v2(79.8,31.425) ICT292.1
VBP2: C63.2 ICT288.1 R78.2 U2.15 | length 12.6
  Top Layer w0.3: U2.15 31.805,26.655 32.525,27.375 34.3,27.375 34.775,27.85 C63.2 ; v1(34.775,31.45) C63.2 ; R78.2 C63.2
  Bottom Layer w0.3: v1(34.775,31.45) 34.8,31.475 ICT288.1
VCP1: C46.2 ICT293.1 R41.2 U9.14 | length 42.5
  Top Layer w0.3: U9.14 56.575,25.475 57.775,26.675 89.525,26.675 90.5,27.65 C46.2 R41.2 v2(92.3,30.4)
  Bottom Layer w0.3: v2@92.3,30.425 v2(92.3,30.4) 93.05,31.15 ICT293.1
VCP2: C64.2 ICT289.1 R84.2 U2.14 | length 30.6
  Top Layer w0.3: U2.14 33.075,26.05 33.629,26.604 41.429,26.604 44.675,29.85 47.6,29.85 ; v1(47.6,31.6) 47.6,29.85 ; C64.2 56.7,29.85 R84.2 47.6,29.85
  Bottom Layer w0.3: v1(47.6,31.6) ICT289.1
VREF: C20.2 C21.2 C56.2 C57.2 D1.2 D1.3 ICT317.1 R32.1 U2.12 U9.12 | length 40.9
  Top Layer w0.6: U2.12 34.695,14.3 C20.2 ; U9.12@57.845,13.08 U9.12 57.845,16.795 v2(57.85,16.8)
  Bottom Layer w0.6: v2(35.175,14.25) 35.2,14.275 44.5,14.275 47.667,17.442 54.283,17.442 55.275,16.45 D1.3 ; R32.1 54.7,13.8 55.275,14.375 D1.3 ; v2(57.85,16.8) 57.85,15.675 57.9,15.625 ; C57.2 C56.2 59.075,15.625 57.9,15.625 ; D1.3 D1.2 57.9,15.625
VSS: B2.1 C1.1 C2.1 C3.2 C4.2 C5.2 C7.2 C17.2 C18.2 C53.2 C54.2 C90.2 CN1.3 CN2.2 CN2.5 D2.3 ICT318.1 pad.0 R23.2 R90.1 R92.2 SG1.2 SG2.2 U2.2 U3.1 U4.5 U8.5 U9.2 | length 147.2
  Top Layer w0.5: v2@67.82,22.08 U8.5 ; C4.2 92.225,16.025 C1.1 C1.1@93.35,16.9
  Top Layer w0.6: U2.2 v2@21.645,16.15 ; C53.2 42.075,12.175 42.55,11.7 44.6,11.7 45.145,12.245 U9.2 45.145,15.33 v2(44.425,16.05) ; v1(80.525,9.825) C90.2 ; D2.3 v1(85.575,17.025) ; U4.5 87.735,12.035 v1(87.75,12.05) ; C4.2 92.275,14.9 95.1,14.9 ; C2.1 95.125,14.925 95.1,14.9 ; C7.2 95.1,14.9 ; v1(98.025,6.125) U3.1
  Top Layer w1: C54.2 C53.2 ; v2(51.425,20.375) v2(64.5,20.375)
  Top Layer w1.2: CN2.5 83.825,20.625 89.725,20.625 CN2.2
  Bottom Layer w0.5: 67.825,20.375 v2(67.825,22.15)
  Bottom Layer w0.6: CN2.5 83.825,20.625 SG1.2 ; SG2.2 89.725,20.625 CN2.2
  Bottom Layer w1: pad.0@3.8,6.5 4.8,7.5 9.725,7.5 18.375,16.15 v2(21.625,16.15) 22.9,17.425 27.9,17.425 29.675,15.65 44,15.65 48.725,20.375 v2(51.425,20.375) ; 19.775,16.15 19.775,13.4 20.6,12.575 C17.2 C18.2 ; v2(64.5,20.375) C3.2 67.825,20.375 ; C5.2 69.975,20.375 71.275,19.075 71.275,11.35 73.33,9.295 CN1.3
  other v1: 80.325,0.875 90.775,0.875 82,0.9 85.9,0.9 87.55,0.9 93.725,0.9 97,0.9 99.275,0.9 77.175,0.925 84.1,0.925 89.275,0.925 92.2,0.925 95.25,0.925 101.5,0.925 75.675,0.95 78.825,0.95 103.775,0.975 72.8,1 74.275,1 115.45,1 117.1,1 105.525,1.025 112.2,1.025 113.65,1.025 107.3,1.05 108.975,1.075 110.7,1.075 118.325,1.175 4.2,1.425 5.6,1.425 2.55,1.525 1.475,1.9 76.3,2 77.9,2 74.9,2.025 81.15,2.025 83.875,2.025 6.775,2.05 71.95,2.05 79.475,2.05 82.525,2.05 73.55,2.075 111.95,2.225 118.325,2.225 102.125,2.475 100.5,2.5 103.85,2.5 107.35,2.5 109.3,2.5 98.675,2.525 105.525,2.525 96.5,2.6 91.525,2.625 89.725,2.65 93.225,2.65 94.95,2.65 115.325,2.975 4.3,3 113.3,3 2.825,3.025 81.675,3.175 111.15,3.275 71.825,3.35 118.35,3.475 7.5,3.575 6.05,3.6 1.5,3.875 89.75,4.2 91.5,4.2 95.175,4.2 97.275,4.2 93.225,4.25 116.9,4.325 81.55,4.5 109.2,4.7 107.475,4.775 105.825,4.8 111.1,4.8 100.95,4.825 102.6,4.825 99.225,4.85 104.325,4.85 7.65,4.9 118.325,5.2 96.675,5.675 71.225,5.725 92.25,5.775 7.275,6.025 118.275,6.65 99.9,6.675 101.75,6.675 103.325,6.675 109.4,6.675 105.1,6.75 107.625,6.75 91.4,6.9 89.775,6.925 71.225,7.4 8.025,7.6 104.975,8.25 103.3,8.275 101.45,8.3 117.775,8.575 111.1,8.625 116.275,8.625 8.825,9.2 1.75,9.25 5.95,9.25 7.425,9.25 108.175,9.7 3.125,9.725 104.95,9.725 108.175,9.725 4.725,9.75 106.675,9.75 109.45,9.75 101.5,9.775 103.3,9.825 74.125,10.225 117.825,10.675 112.95,10.7 114.6,10.7 116.225,10.7 111.15,10.725 8.8,10.925 4.5,10.975 5.925,10.975 7.4,10.975 10.2,10.975 11.675,10.975 1.625,11.025 3.1,11.025 73,11.1 109.025,12.125 104.15,12.15 105.8,12.15 102.35,12.175 107.525,12.175 12.55,12.5 11.275,12.55 117.975,12.825 113.1,12.85 114.75,12.85 111.3,12.875 116.475,12.875 12.475,13.75 13.95,13.75 102.35,14.775 104.125,14.8 106,14.8 118.1,14.8 107.675,14.825 109.25,14.825 111.375,14.825 116.5,14.85 94.425,14.9 113.075,14.9 114.775,14.9 101.725,16.475 103.825,16.5 82.55,17.05 101.875,18.55 92.175,18.575 93.725,18.575 95.35,18.625 100.125,18.7 91.45,19.475 94.325,19.5 93.025,19.525 100.525,20.325 98.9,20.35 99.125,21.85 75.675,23.05 75.3,24.625 77,24.625
  other v2: 20.45,16.15 20.5,17.25 21.75,17.35 20.475,18.45 21.75,18.5 23.075,18.55 21.9,19.8 23.25,19.8 24.725,19.8 20.525,19.825 53.8,20.275 52.625,20.3 46.6,20.35 48.025,20.35 49.675,20.35 55.1,20.35 63.775,20.35 44.35,20.375 45.45,20.375 63.775,21.225 22,21.325 20.575,21.35 23.375,21.35 55.1,21.5 51.25,21.525 52.5,21.525 53.775,21.525
pads on no net: *3.1 Designator28.1 Designator28_1.1 Designator37.1 Designator37_1.1 Designator39.1 Designator39_1.1 Designator49.1 Designator49_1.1 J1.0 J2.0 J3.0 J4.0 J5.0 J6.0 U2.1 U2.17 U2.18 U8.1 U8.2 U8.3 U8.17 U8.18 U9.1 U9.17 U9.18 U9.20 X2.2 X2.4

## Polygon pours and split planes (outlines as drawn)
AGND on Bottom Layer "Bottom Layer-No Net" (solid, remove dead copper, pour order 16): 97.25,26.175 97.925,26.85 97.925,27.525 97.925,32.075 97.275,32.725 89.175,32.725 17.375,32.725 15.825,31.175 15.825,29.75 16.9,28.675 44.575,28.675 44.8,28.9 65.2,28.9 67.95,26.15 67.975,26.175 97.25,26.175
VSS on Bottom Layer "Bottom Layer-No Net" (solid, remove dead copper, pour order 18): 43.325,15.15 42.5,15.975 42.5,22.2 43.325,23.025 55.05,23.025 55.825,22.25 55.825,18.4 55.6,18.175 47.275,18.175 44.25,15.15
VSS on Bottom Layer "Bottom Layer-No Net" (solid, remove dead copper, pour order 21): 15.65,14.175 15.65,24.075 16.075,24.5 24.3,24.5 25.1,25.3 41.675,25.3 43.325,23.65 43.325,15.925 42.55,15.15 29.35,15.15 27.65,16.85 23.125,16.85 21.975,15.7 20.7,15.7 20.35,15.35 20.35,14.2 19.875,13.725 16.1,13.725 15.65,14.175
AGND on Bottom Layer "Bottom Layer-No Net" (solid, remove dead copper, pour order 14): 13.25,9.9 16.55,13.2 18.775,13.2 20.4,11.575 24.4,11.575 24.625,11.8 24.675,11.8 24.675,13 24.8,13.125 28.825,13.125 29.75,12.2 43.625,12.2 44.825,11 47.85,11 48.4,11.55 48.4,14.05 48.625,14.275 52.175,14.275 52.35,14.1 52.35,12.925 52.675,12.6 55.325,12.6 55.6,12.875 55.6,13.75 55.9,14.05 57.825,14.05 58.1,13.775 58.1,12.825 58.325,12.6 60.125,12.6 60.325,12.8 60.325,17.025 60.2,17.15 58.4,17.15 56.6,18.95 56.6,22.65 56.8,22.85 60.9,22.85 61.375,22.375 61.375,15.775 62.575,14.575 69.525,14.575 69.875,14.225 69.875,2.175 68.725,1.025 13.725,1.025 13.25,1.5
VSS on Bottom Layer "Bottom Layer-No Net" (solid, remove dead copper, pour order 13): 71.725,0.4 118.85,0.4 119.6,1.15 119.6,15.85 119.225,16.225 105.675,16.225 98.2,23.7 98.2,24.825 97.4,25.625 67.85,25.625 66.4,24.175 64.3,24.175 63.3,23.175 63.3,20.125 63.7,19.725 69.75,19.725 70.65,18.825 70.65,1.475
AGND on Top Layer "Bottom Layer-No Net" (solid, remove dead copper, pour order 15): 15.525,12.2 15.525,30.875 17.425,32.775 19.475,32.775 19.775,32.475 19.775,27.725 19.025,26.975 19.025,12.5 18.775,11.9 15.825,11.9
AGND on Top Layer "Bottom Layer-No Net" (solid, remove dead copper, pour order 17): 32.05,16.85 32.35,17.15 33.425,17.15 33.8,17.15 34.1,16.85 34.1,15.975 33.625,15.5 33.625,12.45 33.95,12.125 35.025,12.125 35.2,12.3 35.2,12.725 35.4,12.925 40.55,12.925 40.775,12.7 40.775,11.3 40.45,10.975 33.175,10.975 32.575,11.575 32.575,15.625 32.05,16.15 32.05,16.85
VSS on Top Layer "Bottom Layer-No Net" (solid, remove dead copper, pour order 19): 50.208,21.35 51.005,22.148 55.852,22.148 56.5,21.5 62.775,21.5 63.1,21.825 63.85,21.825 64.975,20.7 64.975,19.875 64.625,19.525 44.1,19.525 43.75,19.875 43.75,21.175 43.925,21.35
VSS on Top Layer "Bottom Layer-No Net" (solid, remove dead copper, pour order 22): 19.925,15.8 19.575,16.15 19.575,16.3 19.575,21.85 19.925,22.2 23.575,22.2 25.95,19.825 25.95,19.125 25.775,18.95 25.6,18.95 24.525,18.95 23.375,17.8 22.325,16.75 22.325,16.225 22.325,16.025 22.075,15.775 22.025,15.725 20.425,15.725 20,15.725 19.925,15.8
VSS on Top Layer "Bottom Layer-No Net" (solid, remove dead copper, pour order 12): 71.725,0.4 118.85,0.4 119.6,1.15 119.6,15.85 119.225,16.225 105.675,16.225 98.2,23.7 98.2,24.825 97.4,25.625 67.85,25.625 66.4,24.175 64.3,24.175 63.3,23.175 63.3,20.125 63.7,19.725 69.75,19.725 70.65,18.825 70.65,1.475
VSS on Top Layer "Bottom Layer-No Net" (solid, remove dead copper, pour order 20): 0.825,6.875 9.55,6.875 10.325,7.65 10.425,7.75 10.425,9.1 11.9,10.575 14.475,13.15 14.475,14.425 14.225,14.675 12.525,14.675 10.325,12.475 1.475,12.475 0.85,11.85 0.85,9.075 0.85,6.8 0.875,6.775

## Other copper
Top Layer:
  region net VSS: 9.55,6.875 8.85,6.175 8.85,7.175 9.575,7.175 9.65,7.1 9.55,7
  pour cut-out: 54.85,6.447 54.85,7.95 55.2,8.3 55.6,8.3 55.6,6.738 55.891,6.447
  pour cut-out: 48.955,22.386 48.955,21.57 49.075,21.45 49.51,21.885 50.743,21.885 51.268,22.41 56.435,22.41 56.775,22.75 49.075,22.75 49.075,22.506
  pour cut-out: 59.075,11.85 57.774,11.85 57.342,12.282 57.604,12.544 58.725,12.544 58.725,12.2
  pour cut-out: 57.139,15.071 57.139,16.214 57.375,16.45 57.475,16.35 58.175,16.35 58.975,15.55 58.975,13.95 57.675,13.95 57.175,14.45
  region net VSS: 0.875,7.175 2.175,8.475 7.375,8.475 8.85,7 8.85,1.625 8.025,0.8 1.625,0.8 0.825,1.6 0.825,7.15
  region net VSS: 111.525,7.825 111.95,8.25 119,8.25 119.6,7.65 119.6,1.15 118.85,0.4 112.075,0.4 111.5,0.975 111.5,7.8
  pour cut-out: 93.287,7.75 96.362,7.75 96.488,7.875 96.488,10 96.337,10.15 93.563,10.15 93.287,9.875
  pour cut-out: 99.625,12.1 92.975,12.1 92.975,9.05 93.4,8.625 99.45,8.625 99.625,8.8
  pour cut-out: 96.625,15.767 96.625,14.092 97.1,14.092 97.125,14.117 97.125,15.733 97.091,15.767
  pour cut-out: 96.8,16.312 96.8,18.416 96.525,18.404 96.3,18.404 96.3,16.346 96.334,16.312
  pour cut-out: 91.725,14.058 91.725,15.733 91.25,15.733 91.225,15.708 91.225,14.092 91.259,14.058
  pour cut-out: 91.475,14.62 91.475,16.85 91.422,17.212 91.422,17.912 92.437,17.912 92.437,14.637 92.455,14.62
Bottom Layer:
  pour cut-out: 39.838,17.15 38.163,17.15 38.163,16.675 38.188,16.65 39.803,16.65 39.838,16.684
  region net VSS: 0.825,11.85 1.475,12.5 10.075,12.5 15.9,18.325 15.9,12.975 8.625,5.7 1.05,5.7 0.825,5.925
  pour cut-out: 46.949,15.55 46.375,14.976 46.375,14.75 47.175,14.75 47.275,14.85 47.275,15.55
  pour cut-out: 45.375,13.45 45.375,15.45 43.675,13.75 43.675,13.25 45.475,13.25 45.475,13.35
  pour cut-out: 34.775,23.45 40.975,23.45 42.075,22.35 42.075,17.6 41.725,17.25 34.234,17.25 33.983,17.501 33.983,22.658
  region net VSS: 0.875,7.175 2.175,8.475 7.375,8.475 8.85,7 8.85,1.625 8.025,0.8 1.625,0.8 0.825,1.6 0.825,7.15
  region net VSS: 111.525,7.825 111.95,8.25 119,8.25 119.6,7.65 119.6,1.15 118.85,0.4 112.075,0.4 111.5,0.975 111.5,7.8

## Silkscreen, mask and mechanical layers (free items; w line width, h text height)
Top Overlay:
  lines w0.2: 0,0 0,52 120,52 120,0 0,0
  text "ZMPT107" at 96.175,44.15 h1.5 r270
  text "ZMPT107" at 83.25,44.025 h1.5 r270
  text "ZMPT107" at 50.975,43.975 h1.5 r270
  text "ZMPT107" at 69.625,43.975 h1.5 r270
  text "ZMPT107" at 37.35,43.7 h1.5 r270
  text "L1(1)" at 1.675,43.55 h1
  text "ZMPT107" at 23.725,43.525 h1.5 r270
  text "L3(2)" at 116.125,43.275 h1
  text "N(1)" at 2.55,37.225 h1
  text "N(2)" at 116.15,37.025 h1
  text "L2(2)" at 115.75,30.225 h1
  text "L2(1)" at 0.8,25.45 h1
  text "L1(2)" at 115.775,20.6 h1
  text "L3(1)" at 0.725,15.2 h1
  text "L1(1)" at 14.275,0.45 h1
  text "L2(1)" at 23.975,0.425 h1
  text "L3(1)" at 34.15,0.425 h1
  text "L1(2)" at 43.925,0.4 h1
  text "L2(2)" at 53.65,0.375 h1
  text "L3(2)" at 63.825,0.35 h1
Bottom Overlay:
  text "L1(1)" at 4.7,43.475 h1
  text "L3(2)" at 119.325,43.3 h1
  text "N(1)" at 4.375,37.375 h1
  text "N(2)" at 118.85,37.025 h1
  text "L2(2)" at 119.025,30.15 h1
  text "L2(1)" at 3.95,25.35 h1
  text "L1(2)" at 118.8,20.45 h1
  text "L3(1)" at 3.9,15.15 h1
Mechanical 1:
  lines w0.2: 0,52 0,0 120,0 120,51.975 ; 0,52 120,52
Mechanical 2:
  drawing of 228 lines, arcs and shapes, not listed
  text "3 (mm)" at 0.442,103.402 h1.52 r89.85
  text "52 (mm)" at -2.294,75.151 h1.52 r90
  text "2 (mm)" at -6.907,57.027 h1.52 r270.95
  text "122 (mm)" at -4.25,47.5 h1.52 r90
  text "52 (mm)" at -2.253,21.149 h1.52 r90
  text "38 (mm)" at 121.989,14.15 h1.52 r90
  text "4 (mm)" at 0.482,-2.088 h1.52 r90
  text "4 (mm)" at 124.732,-2.088 h1.52 r90
  text "3 (mm)" at 0.475,-5.598 h1.52 r89.85
  text "57.4 (mm)" at 22.454,-10.164 h1.52
  text "120 (mm)" at 54.515,-12.614 h1.52
  text "4 (mm)" at -2.088,-15.328 h1.52
  text "4 (mm)" at 113.912,-15.357 h1.52
Mechanical 4:
  lines w2.6: 1.1,37.575 4.45,37.575 6.425,39.55 ; 1.875,42.725 11.8,42.725 14.25,45.175 ; 1.9,50.55 112.125,50.55 ; 6.425,39.6 13.125,39.6 ; 14.9,47.825 16.825,45.9 98.95,45.9 102.1,42.75 118.775,42.75 ; 65.575,42.75 97.7,42.75 100.825,39.625 108.175,39.625 110.225,37.575 117.075,37.575
  lines w4.2: 1.9,14.65 9,14.65 13.4,19.05 13.4,31.75 17.05,35.4 17.8,35.4 ; 1.925,25.225 6.375,25.225 8.5,27.35 8.5,33.8 10.825,36.125 ; 28.1,30 28.1,49.5 ; 41.6,30 41.6,49.5 ; 73.3,30.6 73.3,50.1 ; 86.7,30.6 86.7,50.1 ; 106.425,33.65 106.425,31.45 108.95,28.925 117.9,28.925
  lines w5.2: 17.8,35.4 98.5,35.4 101,32.9 101,24.95 106,19.95 107.1,18.85 118,18.85
Mechanical 5:
  lines w2.6: 86.9,46.55 89.3,44.15 97,44.15
Mechanical 7:
  lines w2.6: 15.425,50.975 15.425,47.325 16.85,45.9 18.675,45.9 20.1,47.325 20.1,48.75
Drill Drawing:
  text ".Legend" at 0.3,116.15 h1.5

## Text inside footprints (layer, text, board x,y; h text height)
*3: Drill Drawing "NPTH" at 55.7,34.3 h1
CN1: Bottom Overlay "1" at 76.4,16.25 h1 r90
CN2: Top Overlay "1" at 97.6,23.425 h1 r180; Top Overlay "6" at 74.725,23.225 h1 r180
U3: Top Overlay "4" at 91.625,7.45 h1 r90; Top Overlay "3" at 98.33,11.557 h1 r90; Top Overlay "2" at 98.33,9.042 h1 r90; Top Overlay "1" at 98.225,6.85 h1 r90
X2: Top Overlay "1" at 40.375,17.65 h1 r90; Top Overlay "2" at 40.325,24.05 h1 r90; Top Overlay "3" at 38.335,24.05 h1 r90; Top Overlay "4" at 37.975,17.45 h1 r90